# EAGLE board lamp (EAGLE 5.11)
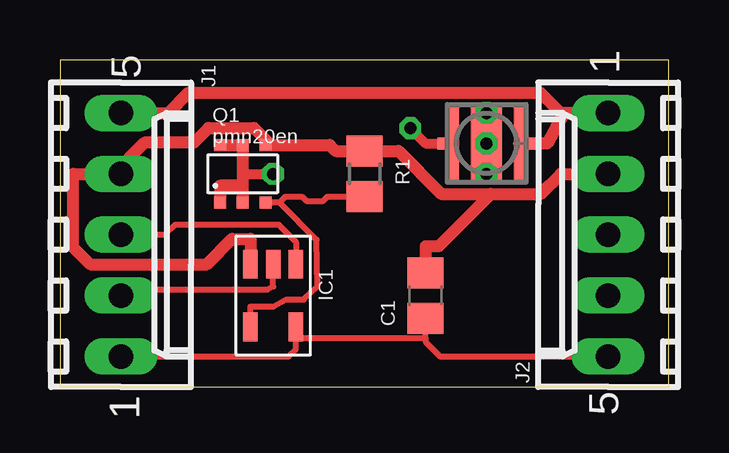
[diagram p0: board, top side]
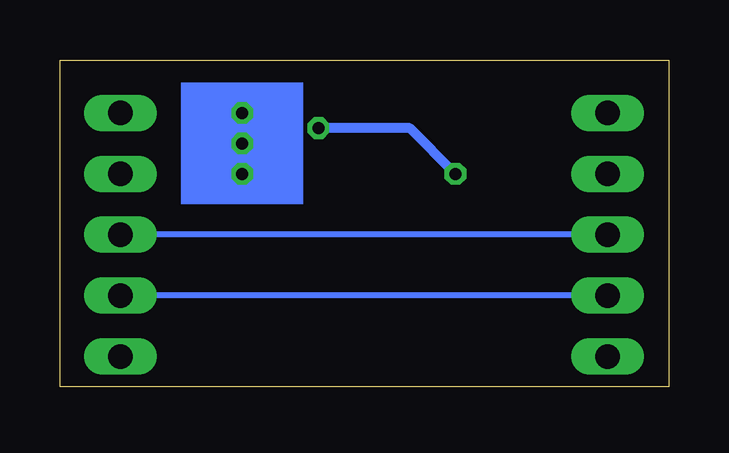
[diagram p1: board, bottom side, seen from below]

Size 25.38 x 13.64 mm. Coordinates in mm from the lower left corner, seen from the top.
Outline: 0,0 25.38,0 25.38,13.64 0,13.64 0,0
Copper layers (1*16): Top 0.035mm / dielectric 1.5mm / Bottom 0.035mm
Design rules "default": minimum track width 10mil, minimum drill 24mil, track to track 8mil, track to pad 8mil, pad to pad 8mil, via to via 8mil, smd to smd 8mil, copper to edge 40mil, drill to drill 8mil, minimum pad ring 10mil, minimum via ring 8mil, stop-mask expansion 4mil, vias tented up to drill 0mil, thermal gap 10mil
Net classes: 1 power: width 0.508 mm, clearance 0.203 mm
tRestrict: area 17.2,8.6 to 18.5,11.6
bRestrict: area 15.2,7.6 to 20.3,12.7

## Footprints (pad centres in the part's own frame; a part is rotated, then mirrored left to right if it is on the bottom)
C0805 = smd 1.3 x 1.5: 1 -0.95,0; 2 0.95,0
SOT-23/5 = smd 0.6 x 1.2: 1 -0.95,-1.306; 2 0,-1.306; 3 0.95,-1.306; 4 0.95,1.306; 5 -0.95,1.306
6410-05 = drill 1.016 long: 1 5.08,0; 2 2.54,0; 3 0,0; 4 -2.54,0; 5 -5.08,0
CREE_XLAMP = smd 0.5 x 3.3: A -1.4,0; C 1.4,0 | smd 0.45 x 0.5: A@1 -1.825,0; C@1 1.825,0 | smd 1.3 x 3.3: X 0,0
BCR405U = smd 0.5 x 0.5: 1 -0.95,-1.2; 2 0,-1.2; 3 0.95,-1.2; 4 0.95,1.2; 5 0,1.2; 6 -0.95,1.2
R0805 = smd 1.3 x 1.5: 1 -0.95,0; 2 0.95,0

## Placement (x,y rotation side)
C1  .1uf  [C0805]  15.24,3.81 90 top
IC1  74LVC1G79GW  [SOT-23/5]  8.89,3.81 180 top
J1  22-27-2051-05  [6410-05]  2.54,6.35 270 top
J2  22-27-2051-05  [6410-05]  22.86,6.35 90 top
LED1  XPEWHT-01-0000-00BC2  [CREE_XLAMP]  17.78,10.16 180 top
Q1  pmn20en  [BCR405U]  7.62,8.89 0 top
R1  10k  [R0805]  12.7,8.89 270 top

## Library data of the parts
C1 R1 = rcl
IC1 = PICOGATE
J1 J2 = con-molex; OC_FARNELL: unknown; OC_NEWARK: unknown
LED1 = led
Q1 = c-infineon

## Nets
+3V3: C1.1 IC1.5 J1.1 J2.5
+12V [power]: J1.5 J2.1 LED1.A
CLK: IC1.2 J1.2 J2.4
D: IC1.1 J1.3 J2.3
GND [power]: C1.2 IC1.3 J1.4 J2.2 Q1.4 R1.1
N$1: IC1.4 Q1.3 R1.2
N$3 [power]: LED1.C Q1.1 Q1.2 Q1.5 Q1.6

## Tracks (layer width: path | path; a pad name or v marks a point on that pad's centre or on a via)
+3V3
  Top 0.254: 15.24,2.04 15.24,1.88 15.85,1.27 J2.5 | 15.24,2.04 C1.1 | 9.84,2.04 9.84,1.57 9.54,1.27 J1.1 | 9.84,2.04 IC1.5 | 9.84,2.04 15.24,2.04
+12V
  Top 0.508: 21.02,11.43 20.88,11.43 20.04,12.27 5.36,12.27 4.52,11.43 J1.5 | 21.02,11.43 J2.1 21.02,11.43 | 21.02,11.43 20.32,10.16 LED1.A
CLK
  Top 0.254: IC1.2 8.89,4.19 8.64,4.06 4.06,4.06 3.81,3.81 J1.2
  Bottom 0.254: J1.2 J2.4
D
  Top 0.254: J1.3 4.39,6.35 4.81,6.77 9.12,6.77 9.84,6.05 IC1.1
  Bottom 0.254: J1.3 J2.3
GND
  Top 0.508: 8.75,10.09 11.24,10.09 11.49,9.84 R1.1 14.11,9.84 15.9,8.05 17.97,8.05 | 8.75,10.09 8.75,10.14 8.09,10.8 6.2,10.8 5.61,10.21 3.56,10.21 2.23,8.89 0.56,8.89 | 0.56,8.89 0.56,5.82 1.26,5.12 6.12,5.12 7.18,6.17 7.94,6.17 IC1.3 | 8.75,10.09 Q1.4 | C1.2 15.24,5.87 15.78,5.87 17.97,8.05 | 17.97,8.05 20.04,8.05 20.88,8.89 J2.2 | 0.56,8.89 J1.4
N$1
  Top 0.254: 9.15,7.69 9.4,7.94 10.09,7.94 10.28,7.76 10.97,7.76 11.15,7.94 R1.2 | IC1.4 7.94,3.36 8.9,3.36 9.44,3.64 10.16,3.64 10.73,4.19 10.71,6.13 9.15,7.69 | Q1.3 8.86,7.69 9.15,7.69
N$3  (via drill 0.5)
  Top 0.406: LED1.C 15.24,10.16 v14.61,10.79 | 7.62,8.89 v8.89,8.89
  Top 0.508: 7.62,8.4 7.62,8.89 Q1.5 Q1.6 | 7.62,8.4 Q1.2 | 7.62,8.4 6.67,8.4 6.67,7.86 Q1.1
  Bottom 0.406: v14.61,10.79 10.79,10.79 v8.89,8.89
S$1  (via drill 0.5)
  other vias: 17.78,11.43
S$2  (via drill 0.5)
  other vias: 17.78,10.16
S$3  (via drill 0.5)
  other vias: 17.78,8.89
(copper drawn outside any net)
  shapes: Bottom area x1